# Altium PCB PCB1.PcbDoc
Units mm, origin at the board's own origin, x right, y up, seen from the top; angles counter-clockwise.
Board outline 149.99 x 100.08 mm, 2 copper layers (Top Layer, Bottom Layer); 80 components, 53 nets, 255 pads, 88 vias.
Unrouted connection lines stored in the file: 1.
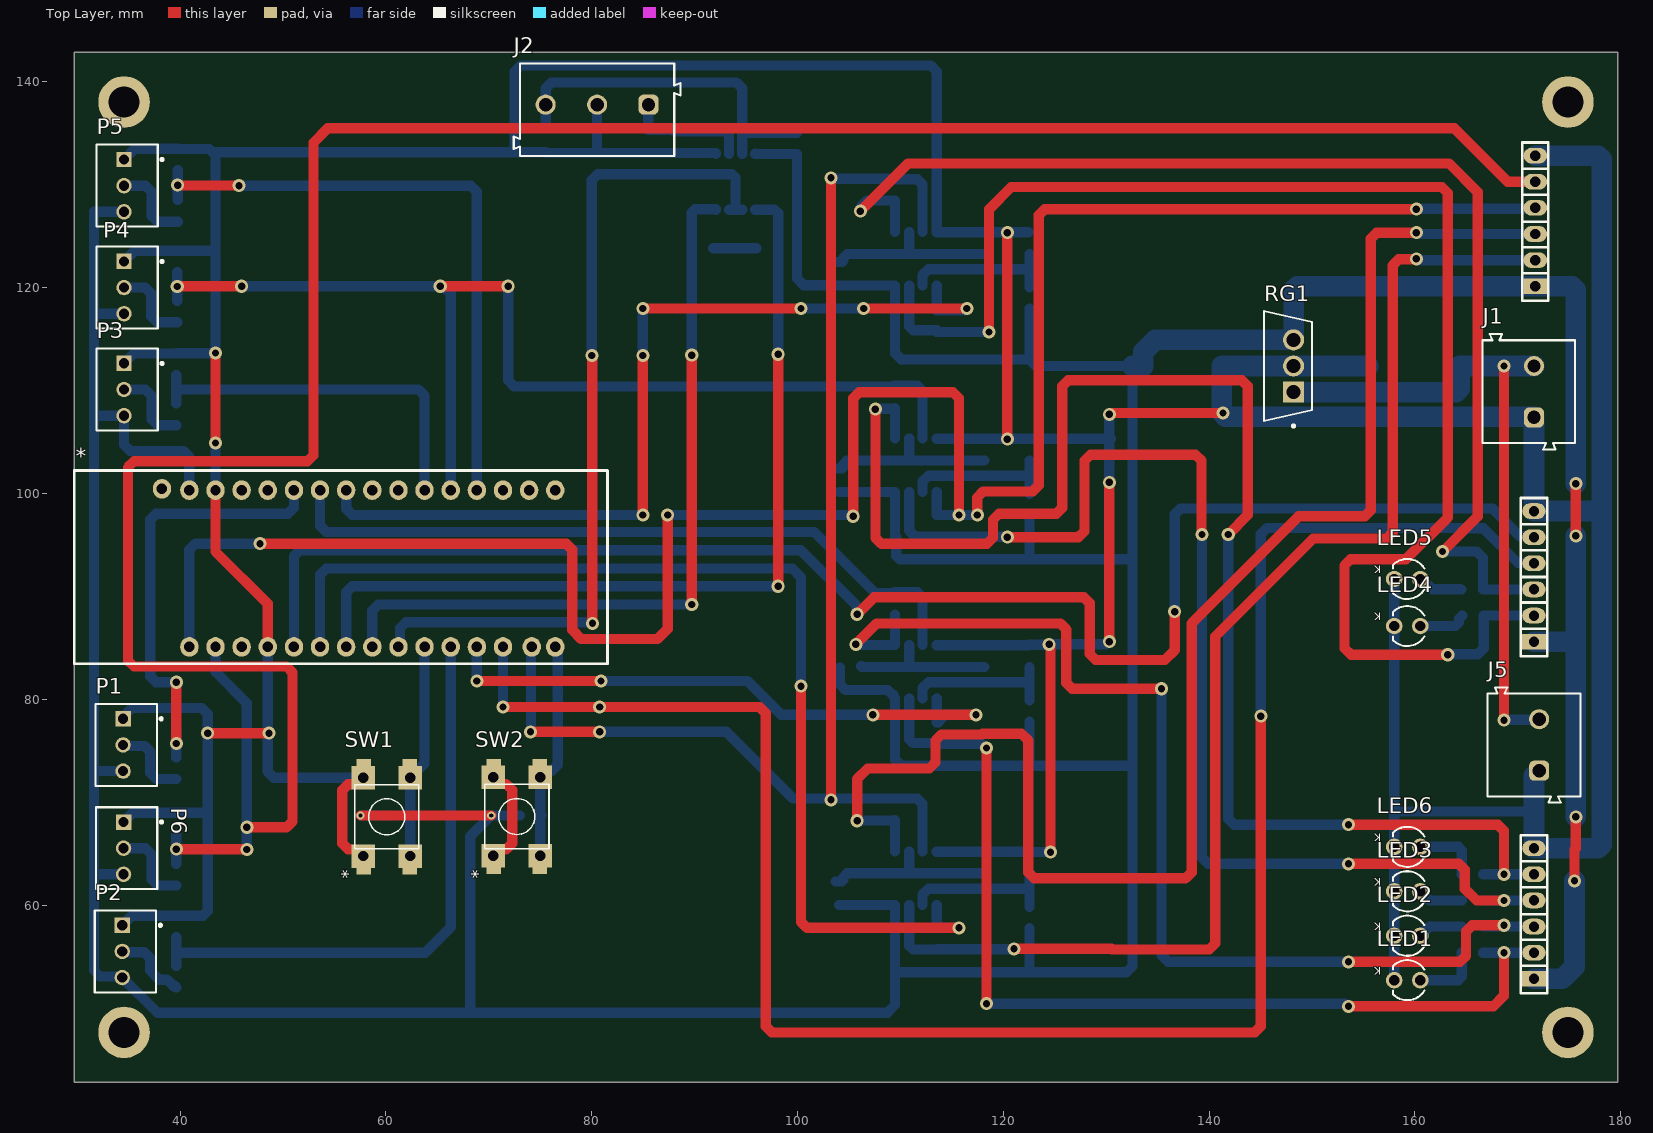
[diagram p0: Top Layer view]
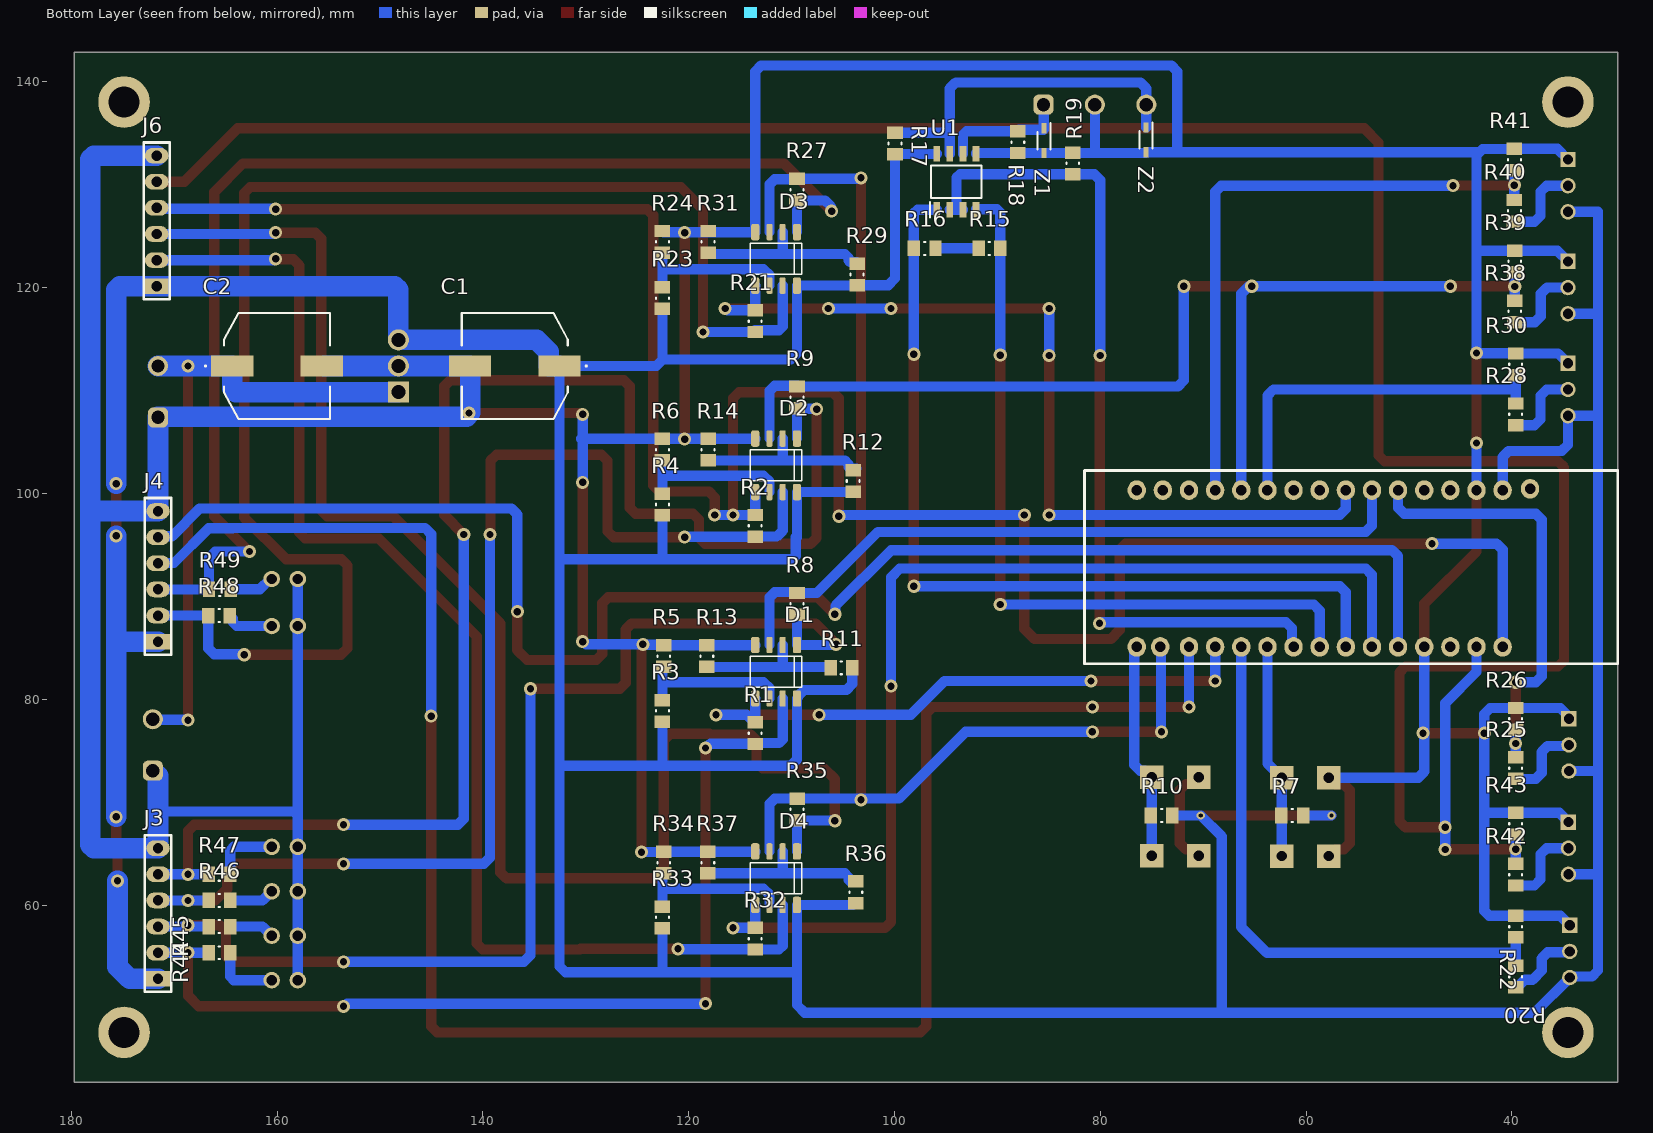
[diagram p1: Bottom Layer view, seen from below]
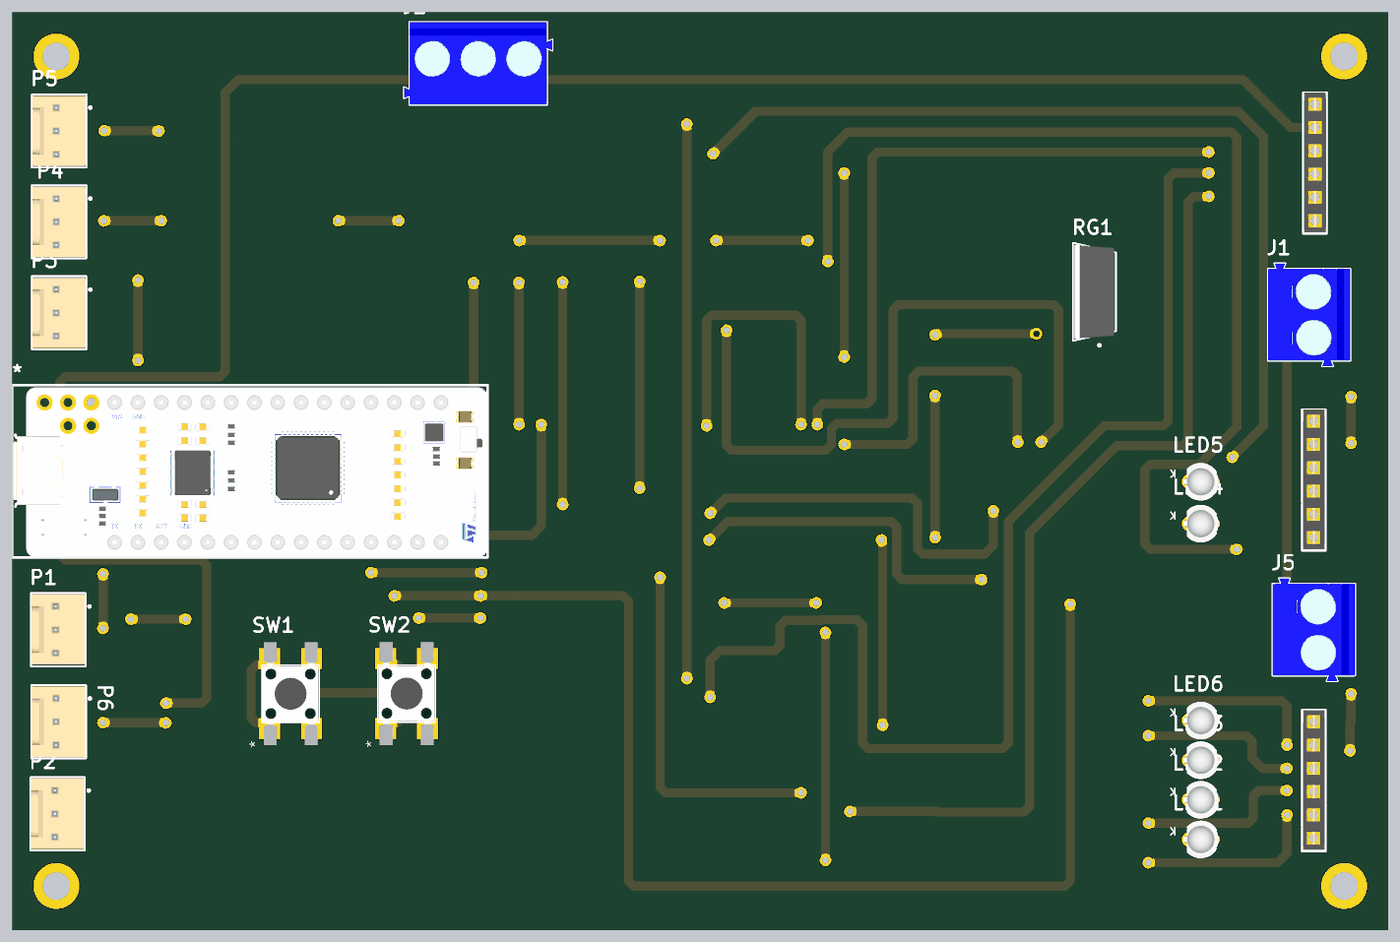
[diagram p2: 3D render of the assembled board from above, using the file's embedded part models]
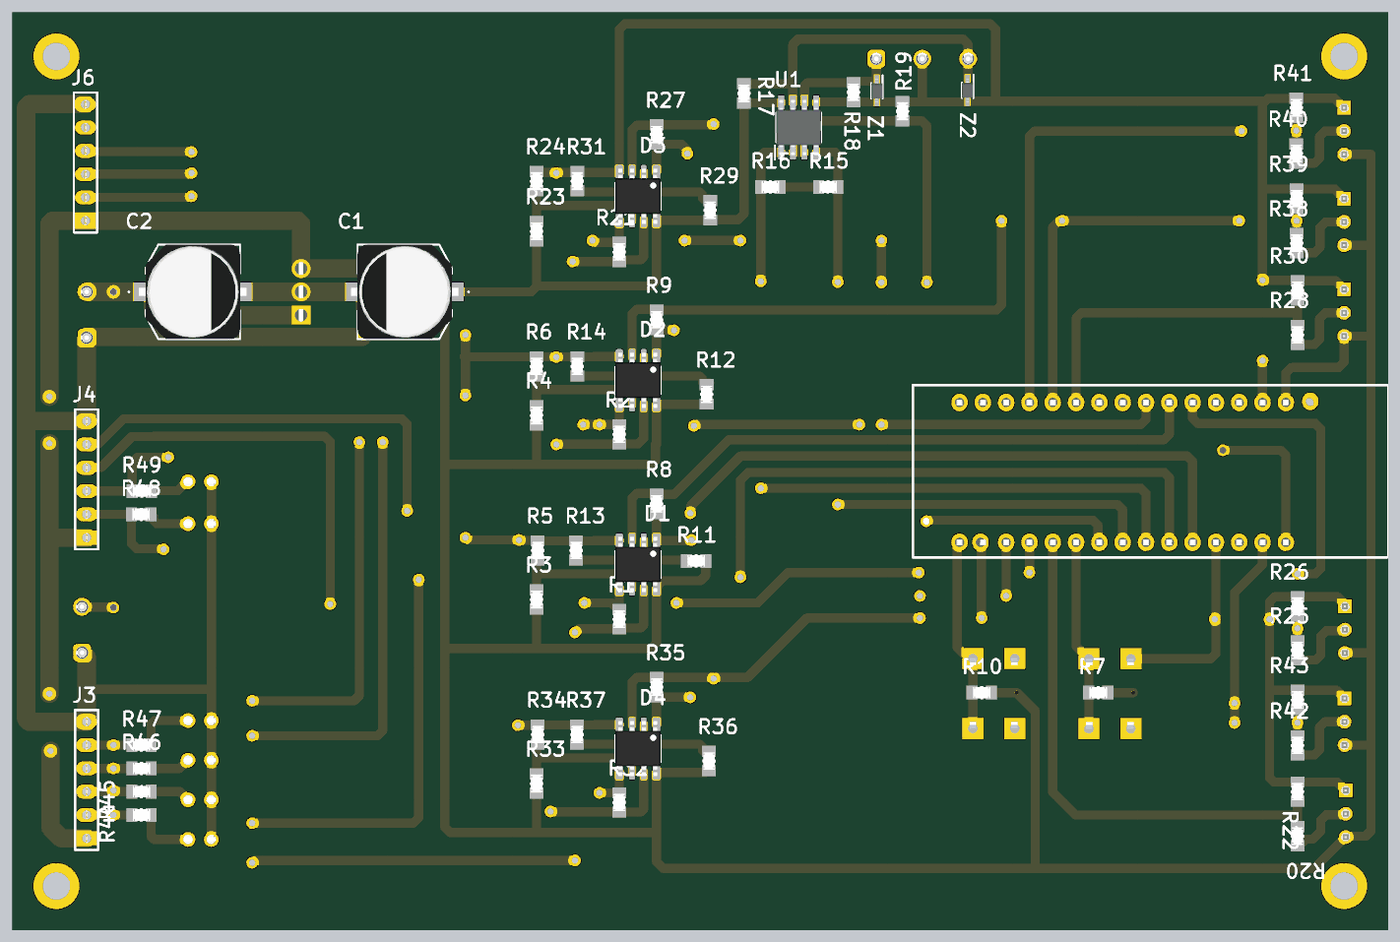
[diagram p3: 3D render of the assembled board from below, using the file's embedded part models]

## Layer stack, top to bottom
Top Solder: solder mask 0.0102, Solder Resist, Dk 3.5
Top Layer: signal copper 0.0356
Dielectric 1: dielectric 0.32, FR-4, Dk 4.8
Bottom Layer: signal copper 0.0356
Bottom Solder: solder mask 0.0102, Solder Resist, Dk 3.5

## Board outline
29.718,42.799 29.718,142.875 179.705,142.875 179.705,42.799

## Design rules (kind name [scope] priority, off if disabled: settings)
Clearance [All] p1: gap=0.254 ignorepadtopadclearanceinfootprint=FALSE except(0: Arc-Hole Track-Hole SMDPad-Hole THPad-Hole Via-Hole Fill-Hole Poly-Hole Region-Hole Text-Hole)
PolygonConnect [All] p1: connectstyle=Relief reliefconductorwidth=0.254 reliefentries=4 polygonreliefangle="90 Angle" airgapwidth=0.254
RoomDefinition Sheet1 [InComponentClass('Sheet1')] p1: confinementstyle=ConfineIn formatcopy=TRUE lockcomponents=FALSE outline 26.289,35.56 504.19,35.56 504.19,165.862 26.289,165.862
RoutingVias [All] p1: holewidth=0.711 width=1.27 viastyle="Through Hole" minholewidth=0.711 minwidth=1.27 maxholewidth=0.711 maxwidth=1.27
SolderMaskExpansion [All] p1: expansion=0.102 istentingtop=FALSE
Width [All] p1: maxlimit=2 minlimit=0.254 preferedwidth=1 minimp=50.000000 maximp=50.000000 favimp=50.000000
30 further rules are at their usual default settings.

## Components (designator, comment, footprint, x,y, rotation, side; value= is the part's Value field where it differs from the comment)
* "STM32F303K8T6" STMicroelectronics_0_MFG 59.563,92.329 r90 top locked
C1 "EEE1HA101AP" EEEFK1V331P 136.906,112.395 r90 bottom
C2 "EEE1HA101AP" EEEFK1V331P 160.02,112.395 r270 bottom
D1 "LMV358AIDR" 8-SOIC 111.506,82.677 r270 bottom
D2 "LMV358AIDR" 8-SOIC 111.506,102.743 r270 bottom
D3 "LMV358AIDR" 8-SOIC 111.506,122.809 r270 bottom
D4 "LMV358AIDR" 8-SOIC 111.506,62.611 r270 bottom
J1 "691101710002" 691101710002 171.077,109.895 r90 top
J2 "691101710003" 691101710003 80.518,137.295 r180 top
J3 "2.54_Connector _x6" "2.54_Connector _x6" 171.704,52.578 r90 bottom
J4 "2.54_Connector _x6" "2.54_Connector _x6" 171.704,85.344 r90 bottom
J5 "691101710002" 691101710002 171.577,75.565 r90 top
J6 "2.54_Connector _x6" "2.54_Connector _x6" 171.831,119.888 r90 bottom
LED1 "151033BS03000" "Type 3mm" 159.258,52.705 r180 top
LED2 "151033BS03000" "Type 3mm" 159.258,57.023 r180 top
LED3 "151033BS03000" "Type 3mm" 159.258,61.341 r180 top
LED4 "151033BS03000" "Type 3mm" 159.258,87.122 r180 top
LED5 "151033BS03000" "Type 3mm" 159.258,91.694 r180 top
LED6 "151033BS03000" "Type 3mm" 159.258,65.659 r180 top
P1 "61900311121" 61900311121 34.752,75.565 r90 top
P2 "61900311121" 61900311121 34.671,55.499 r90 top
P3 "61900311121" 61900311121 34.844,110.109 r90 top
P4 "61900311121" 61900311121 34.844,120.015 r90 top
P5 "61900311121" 61900311121 34.844,129.921 r90 top
P6 "61900311121" 61900311121 34.798,65.532 r90 top
R1 "1M" Vishay_CRCW0805-e3_IPC_A 113.538,76.708 r90 bottom
R2 "1M" Vishay_CRCW0805-e3_IPC_A 113.538,96.866 r90 bottom
R3 "10K" Vishay_CRCW0805-e3_IPC_A 122.555,78.867 r270 bottom
R4 "10K" Vishay_CRCW0805-e3_IPC_A 122.555,98.933 r270 bottom
R5 "2.2K" Vishay_CRCW0805-e3_IPC_A 122.428,84.201 r270 bottom
R6 "2.2K" Vishay_CRCW0805-e3_IPC_A 122.555,104.267 r270 bottom
R7 "10K" Vishay_CRCW0805-e3_IPC_A 61.341,68.707 r180 bottom
R8 "1M" Vishay_CRCW0805-e3_IPC_A 109.474,89.281 r90 bottom
R9 "1M" Vishay_CRCW0805-e3_IPC_A 109.474,109.347 r90 bottom
R10 "10K" Vishay_CRCW0805-e3_IPC_A 74.041,68.707 r180 bottom
R11 "10K" Vishay_CRCW0805-e3_IPC_A 105.156,83.058 r180 bottom
R12 "10K" Vishay_CRCW0805-e3_IPC_A 104.013,101.219 r270 bottom
R13 "2.2K" Vishay_CRCW0805-e3_IPC_A 118.237,84.201 r270 bottom
R14 "2.2K" Vishay_CRCW0805-e3_IPC_A 118.11,104.267 r270 bottom
R15 "10K" Vishay_CRCW0805-e3_IPC_A 90.77,123.825 r0 bottom
R16 "10K" Vishay_CRCW0805-e3_IPC_A 97.063,123.825 r180 bottom
R17 "10K" Vishay_CRCW0805-e3_IPC_A 99.949,134.02 r270 bottom
R18 "10K" Vishay_CRCW0805-e3_IPC_A 88.011,134.147 r90 bottom
R19 "10K" Vishay_CRCW0805-e3_IPC_A 82.677,132.08 r270 bottom
R20 "33K" Vishay_CRCW0805-e3_IPC_A 39.624,53.051 r270 bottom
R21 "1M" Vishay_CRCW0805-e3_IPC_A 113.538,116.748 r90 bottom
R22 "10K" Vishay_CRCW0805-e3_IPC_A 39.624,57.912 r90 bottom
R23 "10K" Vishay_CRCW0805-e3_IPC_A 122.555,118.999 r270 bottom
R24 "2.2K" Vishay_CRCW0805-e3_IPC_A 122.555,124.46 r270 bottom
R25 "33K" Vishay_CRCW0805-e3_IPC_A 39.624,73.314 r270 bottom
R26 "10K" Vishay_CRCW0805-e3_IPC_A 39.624,78.105 r90 bottom
R27 "1M" Vishay_CRCW0805-e3_IPC_A 109.474,129.54 r90 bottom
R28 "33K" Vishay_CRCW0805-e3_IPC_A 39.624,107.696 r270 bottom
R29 "10K" Vishay_CRCW0805-e3_IPC_A 103.632,121.285 r270 bottom
R30 "10K" Vishay_CRCW0805-e3_IPC_A 39.624,112.557 r90 bottom
R31 "2.2K" Vishay_CRCW0805-e3_IPC_A 118.11,124.46 r270 bottom
R32 "1M" Vishay_CRCW0805-e3_IPC_A 113.538,56.734 r90 bottom
R33 "10K" Vishay_CRCW0805-e3_IPC_A 122.555,58.801 r270 bottom
R34 "2.2K" Vishay_CRCW0805-e3_IPC_A 122.428,64.135 r270 bottom
R35 "1M" Vishay_CRCW0805-e3_IPC_A 109.46,69.304 r90 bottom
R36 "10K" Vishay_CRCW0805-e3_IPC_A 103.759,61.249 r270 bottom
R37 "2.2K" Vishay_CRCW0805-e3_IPC_A 118.143,64.135 r270 bottom
R38 "33K" Vishay_CRCW0805-e3_IPC_A 39.716,117.694 r270 bottom
R39 "10K" Vishay_CRCW0805-e3_IPC_A 39.716,122.555 r90 bottom
R40 "33K" Vishay_CRCW0805-e3_IPC_A 39.751,127.473 r270 bottom
R41 "10K" Vishay_CRCW0805-e3_IPC_A 39.751,132.461 r90 bottom
R42 "33K" Vishay_CRCW0805-e3_IPC_A 39.624,62.957 r270 bottom
R43 "10K" Vishay_CRCW0805-e3_IPC_A 39.624,67.91 r90 bottom
R44 "220" Vishay_CRCW0805-e3_IPC_A 165.608,55.372 r0 bottom
R45 "220" Vishay_CRCW0805-e3_IPC_A 165.608,57.912 r0 bottom
R46 "220" Vishay_CRCW0805-e3_IPC_A 165.608,60.452 r0 bottom
R47 "220" Vishay_CRCW0805-e3_IPC_A 165.608,62.992 r0 bottom
R48 "220" Vishay_CRCW0805-e3_IPC_A 165.643,88.138 r0 bottom
R49 "220" Vishay_CRCW0805-e3_IPC_A 165.573,90.678 r0 bottom
RG1 "Reg_Fairchild_LM7805CT_eec" ON_Semiconductor_TO220B03_MFG 147.669,112.395 r180 top
SW1 "4-1437565-2" SW4_FSM-5P23_TEC 60.071,68.58 r90 top
SW2 "4-1437565-2" SW4_FSM-5P23_TEC 72.72,68.605 r90 top
U1 "MAX485ECSA+" SOIC127P600X175-8N 93.98,130.302 r90 bottom
Z1 "MM3Z5V1ST1G" SOD2512X110N 85.471,134.296 r270 bottom
Z2 "MM3Z5V1ST1G" SOD2512X110N 75.565,134.366 r270 bottom

## Footprints (in the part's own frame and the unit in brackets; to place one, negate y for a bottom-side part, rotate by r counter-clockwise, add the part's x,y. Pads: shape width x height; smd on the part's side, far side on the other; paste and mask are expansions set on the pad)
"2.54_Connector _x6" [mil]
  rect 60x90 hole 40: 1(10,-5)
  oval 60x90 hole 40: 2(110,-5) 3(210,-5) 4(310,-5) 5(410,-5) 6(510,-5)
  silkscreen extent -40,-55 560,45, body extent -40,-52 560,42, height 108
8-SOIC [mm] "SOIC, 8-Leads, Body 4,90x3,90mm, Pitch 1,27mm, IPC Medium Density"
  rrect50% 1.6x0.8 smd: 1(-2.6,2.025) 4(-2.6,-2.025) 5(2.6,-2.025) 8(2.6,2.025)
  rrect50% 1.6x0.6 smd: 2(-2.6,0.635) 3(-2.6,-0.635) 6(2.6,-0.635) 7(2.6,0.635)
  silkscreen extent -1.5,-2.5 1.5,2.5, body extent -3,-2.45 3,2.45, height 1.75
61900311121 [mm] "2.54mm Male Locking Header, 3p"
  rect 1.5x1.5 hole 1: 1(2.54,0.3)
  round 1.5 hole 1: 2(0,0.3) 3(-2.54,0.3)
  silkscreen extent -3.98,-3.52 3.98,2.98, body extent -3.81,-2.9 3.81,2.9, height 11.53
691101710002 [mm] "5,00mm - modular - blue - Horizontal entry with pressure clamp - 12,6mm height - 02p"
  rrect50% 1.95x1.95 hole 1.3: 1(-2.5,-0.5)
  round 1.95 hole 1.3: 2(2.5,-0.5)
  silkscreen extent -5.6,-4.5 5.6,4.5, body extent -5.6,-4.5 5.6,4.5, height 12.65
691101710003 [mm] "5,00mm - modular - blue - Horizontal entry with pressure clamp - 12,6mm height - 03p"
  rrect50% 1.95x1.95 hole 1.3: 1(-5,-0.5)
  round 1.95 hole 1.3: 2(0,-0.5) 3(5,-0.5)
  silkscreen extent -8.1,-4.5 8.1,4.5, body extent -8.1,-4.5 8.1,4.5, height 12.65
EEEFK1V331P [mm]
  rect 2x4.1 smd: 1(0,-4.35) 2(0,4.35)
  silkscreen extent -5.15,-7 5.15,5.15, body extent -5.15,-5.85 5.15,5.85, height 10.3
ON_Semiconductor_TO220B03_MFG [mm]
  rect 2.05x2.05 hole 1.35 paste-1000 mask+0: 1(-0.54,2.535)
  round 2.05 hole 1.35 paste-1000 mask+0: 2(-0.54,0) 3(-0.54,-2.535)
  silkscreen extent -2.35,-5.34 2.35,5.96, body extent -2.45,-5.44 2.45,5.44, height 0.25
SOD2512X110N [mm]
  rect 1x0.5 smd: 1(-1.2,0) 2(1.2,0)
  silkscreen extent -1.7,-0.63 0.85,0.63, body extent -1.25,-0.63 1.25,0.63, height 1.1
SOIC127P600X175-8N [mm]
  rect 1.525x0.65 smd: 1(-2.712,1.905) 2(-2.712,0.635) 3(-2.712,-0.635) 4(-2.712,-1.905) 5(2.712,-1.905) 6(2.712,-0.635) 7(2.712,0.635) 8(2.712,1.905)
  silkscreen extent -3.47,-2.45 1.6,2.58, body extent -3,-2.45 3,2.45, height 1.75
STMicroelectronics_0_MFG [mil]
  oval 75x70 hole 40: 0(-285,735) 1(-285,635) 2(-285,535) 3(-285,435) 4(-285,335) 5(-285,235) 6(-285,135) 7(-285,35) 8(-285,-65) 9(-285,-165) 10(-285,-265) 11(-285,-365) 12(-285,-465) 13(-285,-575) 14(-285,-665) 15(315,735) 16(315,635) 17(315,535) 18(315,435) 19(315,335) 20(315,235) 21(315,135) 22(315,35) 23(315,-65) 24(315,-165) 25(315,-265) 26(315,-365) 27(315,-465) 28(315,-565) 29(315,-665) 30(320,840)
  silkscreen extent -350,-865 390,1175, body extent -350,-865 380,1169, height 289
SW4_FSM-5P23_TEC [mil]
  rect 83x55 smd paste+0 mask+0: 1(-179,88) 2(179,88) 3(-179,-88) 4(179,-88)
  rect 90x90 hole 40: 1(-150,90) 2(150,90) 3(-150,-90) 4(150,-90)
  silkscreen extent -123,-123 123,123, body extent -152,-118 152,118, height 669
"Type 3mm" [mm] "THT, LED-3mm, 2pin- Body 4.15mm(max)"
  round 1.6 hole 1: 1(1.27,0) 2(-1.27,0)
  silkscreen extent -1.66,-1.95 1.4,1.95, body extent -1.93,-1.94 1.87,1.94, height 10.5
Vishay_CRCW0805-e3_IPC_A [mil]
  rect 47.5x59.38 smd paste+0 mask+0: 1(-41.37,0) 2(41.37,0)
  silkscreen extent -3,-25 3,25, body extent -39,-25 39,25, height 20

## Part data
C1 C2: "Capacitor Polarised", Manufacturer_Name=Panasonic, Datasheet Link=http://industrial.panasonic.com/cdbs/www-data/pdf/RDE0000/ABA0000C1142.pdf, Manufacturer_Part_Number=EEE1HA101AP
D1 D2 D3 D4: "Микросхема сдвоенный ОУ", Package=8-SOIC, ComponentDescription="Микросхема сдвоенный ОУ, LMV358AIDR, 8-SOIC", ComponentTypе="Микросхема сдвоенный ОУ"
J1 J5: "WR-TBL Series 101 Horizontal Entry Modular, THT, pitch 5mm, 2p", Manufacturer="Wurth Elektronik", Operating Temperature Max=105°C, Operating Temperature Min=-40°C, Rated Current=16A, Working Voltage=250V, Application="Pressure Clamp", Category="Terminal Blocks", ComponentLink1Description="Website Link", ComponentLink1URL=https://www.we-online.com/redexpert/article/691101710002?ad, ComponentLink2Description="Datasheet Link", ComponentLink2URL=https://www.we-online.com/redexpert/spec/691101710002?ad, Manufacturer Part Number=691101710002, Match Code=WR-TBL, Modularity=Yes, Mount="Through Hole", Number of Pins=2, Number of Rows=1, Orientation=Horizontal, Packaging=Box, Pitch=5mm
J2: "WR-TBL Series 101 Horizontal Entry Modular, Through Hole, pitch 5mm, 3p", Manufacturer="Wurth Elektronik", Operating Temperature Max=105°C, Operating Temperature Min=-40°C, Rated Current=16A, Working Voltage=250V, Application="Pressure Clamp", Category="Terminal Blocks", ComponentLink1Description="Manufacturer Link", ComponentLink1URL=https://www.we-online.com/redexpert/article/691101710003?ad, ComponentLink2Description=Datasheet, ComponentLink2URL=https://www.we-online.com/redexpert/spec/691101710003?ad, Manufacturer Part Number=691101710003, Match Code=WR-TBL, Modularity=Yes, Mount="Through Hole", Orientation=Horizontal, Packaging=Box, PCB/Cable/Panel=PCB, Pin Number=3, Pitch=5mm
LED1 LED2 LED3 LED4 LED5 LED6: "THT LED round mono-color waterclear, WL-TMRW , Blue", Emitting color=Blue, Manufacturer="Wuerth Elektronik", ComponentLink1Description="Manufacturer URL", ComponentLink1URL=http://www.we-online.com, ComponentLink2Description=Datasheet, ComponentLink2URL=http://katalog.we-online.de/pbs/datasheet/7448042001.pdfhttp://katalog.we-online.de/pbs/datasheet/7448042001.pdfhttp://katalog.we-online.de/pbs/datasheet/7448042001.pdfhttp://katalog.we-online.de/pbs/datasheet/151033BS03000.pdf, PackageReference="Type 3mm", PartNumber=151033BS03000
P1 P2 P3 P4 P5 P6: "WR-WTB THT Male Vertical Locking Header, pitch 2.54mm, 3p", Contact Resistance=20mOhm, Operating Temperature="-40 to +105degC", Rated Current=3A, Withstanding Voltage=1000VAC, Working Voltage=250VAC, ComponentLink1Description=Manufacturer, ComponentLink1URL=http://www.we-online.de, ComponentLink2Description=Datasheet, ComponentLink2URL=https://www.we-online.com/catalog/datasheet/61900311121.pdf, Gender=Male, Mounting Technology=THT, Packaging=Bag, Part Number=61900311121, Pin Number=3, Pitch=2.54mm, Published Date="January 2020", Publisher="Wurth Elektronik", Type=Vertical
R1 R2 R3 R4 R5 R6 R7 R8 R9 R10 R11 R12 R13 R14 R15 R16 R17 R18 R19 R20 R21 R22 R23 R24 R25 R26 R27 R28 R29 R30 R31 R32 R33 R34 R35 R36 R37 R38 R39 R40 R41 R42 R43 R44 R45 R46 R47 R48 R49: library part RC0805FR-07100KL
RG1: "REG IC REG LINEAR 5V 1A TO220AB", Current-Output=1A, Digikey Part Number=LM7805CT-ND, Manufacturer=Fairchild, Mouser Part Number=512-LM7805CT, Package=TO220, Part Number=LM7805CT, Temperature="-40°C to +125°C", Temperature Range High=+125°C, Temperature Range Low=-40°C, Voltage - Input (Max)=35V, Voltage - Output=5V, Voltage Dropout (Max)="2V @ 1A (Typ)", ComponentLink1Description=Upverter, ComponentLink1URL=https://upverter.com/upn/revision/b27a7358b7dd93a3/, ComponentLink2Description=Datasheet, ComponentLink2URL=https://www.fairchildsemi.com/datasheets/LM/LM7805.pdf, Digikey Description="REG IC REG LINEAR 5V 1A TO220AB", helpURL=https://upverter.com/upn/revision/b27a7358b7dd93a3/, Ipc Land Pattern Name=TO-220, Lead Free=yes, Price=0.384521982769, RoHS=TRUE, Supplier 1=Digi-Key, Supplier 2=Mouser, Supplier Part Number 1=LM7805CT-ND, Supplier Part Number 2=512-LM7805CT
SW1 SW2: "No Description Available", Mfr_Name="TE Connectivity", Copyright="Copyright (C) 2022 Ultra Librarian. All rights reserved.", Manufacturer_Part_Number=4-1437565-2, RefDes=RefDes, Type=DEV
Z1 Z2: "Zener Diode", Manufacturer_Name=onsemi, Mouser Part Number=863-MM3Z5V1ST1G, Arrow Part Number=MM3Z5V1ST1G, Arrow Price/Stock=https://www.arrow.com/en/products/mm3z5v1st1g/on-semiconductor?region=nac, Datasheet Link=http://www.onsemi.com/pub/Collateral/MM3Z2V4ST1-D.PDF, Height=1.1mm, Manufacturer_Part_Number=MM3Z5V1ST1G, Mouser Price/Stock=https://www.mouser.co.uk/ProductDetail/onsemi/MM3Z5V1ST1G?qs=HVbQlW5zcXXFXX%2FQxsNWFg%3D%3D

## Free pads (board coordinates)
  round 5 hole 3: 2(34.544,47.625) 2(34.544,138.049) 2(174.879,47.625) 2(174.879,138.049)

## Via types
v1: diameter 1.27, hole 0.711, Top Layer to Bottom Layer, 86 vias
v2: diameter 0.8, hole 0.4, Top Layer to Bottom Layer, tented both sides, 2 vias

## Nets (pads, with @x,y where several pads share a name; then routed paths per layer and width w, separated by ;. In a path a pad name is that pad's centre, name@x,y a point inside that pad or via, vN(x,y) a via of type N, cw(c..) or ccw(c..) an arc to the next point about the centre after c; other vN are vias at no path point)
+3v3: R15.2 R16.2 | length 4.2
  Bottom Layer w1: R15.2 R16.2
GND: *.3 *.16 C1.2 C2.2 D1.4 D2.4 D3.4 D4.4 J1.1 J2.2 J3.6 J4.6 J5.1 J6.6 LED1.1 LED2.1 LED3.1 LED4.1 LED5.1 LED6.1 P1.1 P2.1 P3.1 P4.1 P5.1 P6.1 R5.1 R6.1 R13.1 R14.1 R18.1 R19.1 R22.2 R24.1 R26.2 R30.2 R31.1 R34.1 R37.1 R39.2 R41.2 R43.2 RG1.2 SW1.1 SW1.2 SW2.1 SW2.2 U1.5 Z1.2 Z2.2 | length 624
  Top Layer w1: v1(42.672,76.708) v1(48.641,76.708) ; *.16 43.434,94.361 48.514,89.281 *.3 ; v1(43.434,104.902) v1(43.434,113.665) ; SW1.1@57.785,64.77 57.142,65.413 56.339,65.413 55.753,65.999 55.753,71.161 56.339,71.747 57.142,71.747 57.531,72.136 57.531,72.644 SW1.2@57.785,72.39 ; SW2.1@70.434,64.795 71.077,65.438 71.677,65.438 72.263,66.024 72.263,71.187 71.677,71.772 71.077,71.772 70.663,72.187 70.663,72.644 SW2.2@70.434,72.415 ; v1(120.396,105.283) v1(120.396,125.349) ; v1(124.46,85.344) 124.46,85.271 124.587,85.144 v1(124.587,65.151) ; v1(130.302,85.598) v1(130.302,101.092) ; v1(130.302,107.696) 130.375,107.696 130.502,107.823 v1(141.351,107.823)
  Bottom Layer w1: P2.1 35.295,58.963 R22.2 42.199,58.963 42.672,59.436 42.672,69.215 ; P1.1 34.702,78.355 34.702,78.57 35.288,79.156 R26.2 42.086,79.156 42.672,78.57 v1(42.672,76.708) 42.672,69.215 ; P6.1 35.387,68.961 R43.2 42.418,68.961 42.672,69.215 ; P3.1 35.503,113.608 R30.2 39.653,113.636 43.405,113.636 v1(43.434,113.665) 43.434,123.606 ; P4.1 35.595,123.606 R39.2 43.434,123.606 ; P5.1 35.595,133.512 R41.2 39.786,133.477 42.848,133.477 43.159,133.166 ; *.16 v1(43.434,104.902) ; *.3 48.514,72.976 49.1,72.39 SW1.2@57.785,72.39 ; J2.2 80.518,133.121 80.543,133.096 ; U1.5 92.075,133.071 92.05,133.096 R18.1 Z1.2 80.543,133.096 ; D4.4 113.544,65.198 116.319,65.198 116.332,65.186 R34.1 122.445,65.168 124.57,65.168 v1(124.587,65.151) ; D1.4 113.544,85.264 116.319,85.264 116.332,85.252 R13.1 R5.1 122.474,85.298 124.414,85.298 v1(124.46,85.344) 129.975,85.344 130.229,85.598 v1(130.302,85.598) ; D2.4 113.544,105.33 116.319,105.33 116.332,105.318 R14.1 R6.1 130.429,105.318 ; R24.1@122.428,125.384 116.332,125.384 116.319,125.396 113.544,125.396 D3.4 113.531,141.019 112.945,141.605 73.103,141.605 72.517,141.019 72.517,133.166 ; v1(130.302,101.092) v1(130.302,107.696) ; v1@141.224,107.833 v1@141.575,107.482 ; C1.2@141.224,112.363 C1.2 ; LED1.1 LED2.1 LED3.1 LED6.1 157.988,68.737 ; LED5.1 LED4.1 157.988,68.737 ; 171.537,69.088 158.339,69.088 157.988,68.737 ; J5.1@171.577,72.565 J5.1 ; 43.159,133.166 43.434,132.891 43.434,123.606 ; 43.159,133.166 72.517,133.166 ; 72.517,133.166 Z2.2 75.565,133.146 75.615,133.096 80.543,133.096
  Bottom Layer w2: v1@141.224,107.833 C1.2@141.224,112.363 ; C1.2 RG1.2 C2.2@155.448,112.395 ; v1@141.575,107.482 J1.1@171.569,107.482 ; 171.537,69.088 171.577,69.048 ; J5.1@171.577,72.565 171.577,69.048 ; J1.1@171.577,107.474 J4.6 178.054,98.298 178.181,98.171 ; J6.6 177.83,132.842 178.181,132.491 178.181,98.171 ; 171.577,69.048 J3.6 177.83,65.532 178.181,65.883 178.181,98.171
Net*_0: *.0 D2.5 J6.4 R2.2 | length 216.8
  Top Layer w1: v1(47.752,95.123) 77.519,95.123 78.105,94.537 78.105,86.741 78.994,85.852 86.36,85.852 87.376,86.868 v1(87.376,97.917) ; v1(105.41,97.79) 105.41,109.269 105.996,109.855 115.111,109.855 115.697,109.269 v1(115.697,97.917) ; v1@117.475,97.99 117.475,99.617 118.061,100.203 122.858,100.203 123.444,100.789 123.444,127.049 124.03,127.635 v1(160.147,127.635)
  Bottom Layer w1: *.0 40.894,94.537 41.48,95.123 v1(47.752,95.123) ; v1(87.376,97.917) 105.21,97.917 105.337,97.79 v1(105.41,97.79) ; D2.5 113.534,100.139 113.534,97.921 R2.2 v1(115.697,97.917) v1(117.475,97.917) ; v1(160.147,127.635) 160.199,127.687 171.629,127.687 J6.4
Net*_1: *.1 J6.5 R42.1 R43.1 | length 255.5
  Top Layer w1: v1(39.624,65.434) 39.638,65.419 46.468,65.419 v1(46.482,65.405) ; v1(46.482,67.564) 50.341,67.564 50.927,68.15 50.927,82.599 50.341,83.185 35.511,83.185 34.925,83.771 34.925,102.538 35.511,103.124 52.373,103.124 52.959,103.71 52.959,134.112 54.356,135.509 163.83,135.509 169.037,130.302 J6.5
  Bottom Layer w1: R42.1 v1(39.624,65.434) R43.1 ; *.1 43.434,82.677 46.482,79.629 v1(46.482,67.564) v1(46.482,65.405)
Net*_4: *.4 J4.5 | length 153.7
  Top Layer w1: v1(105.791,88.265) 107.442,89.916 127.811,89.916 128.397,89.33 128.397,84.406 128.983,83.82 135.685,83.82 136.652,84.787 v1(136.652,88.519)
  Bottom Layer w1: *.4 51.054,93.902 51.64,94.488 100.33,94.488 105.739,89.079 105.739,88.317 v1(105.791,88.265) ; v1(136.652,88.519) 136.652,97.966 137.238,98.552 167.513,98.552 170.207,95.858 171.477,95.858 J4.5
Net*_5: *.5 D4.5 R32.2 | length 107.9
  Top Layer w1: v1(100.33,81.28) 100.33,58.371 100.916,57.785 v1(115.697,57.785)
  Bottom Layer w1: *.5 53.594,92.124 54.18,92.71 99.49,92.71 100.33,91.87 v1(100.33,81.28) ; D4.5 113.534,60.008 113.534,57.789 R32.2 v1(115.697,57.785)
Net*_6: *.6 R16.1 U1.1 | length 86.2
  Top Layer w1: v1(98.114,113.538) v1(98.114,90.989) v1@98.171,90.932
  Bottom Layer w1: *.6 56.134,90.403 56.72,90.989 v1(98.114,90.989) ; U1.1 97.762,127.59 98.114,127.239 R16.1 v1(98.114,113.538)
Net*_7: *.7 R15.1 U1.4 | length 75.5
  Top Layer w1: v1@89.662,89.154 v1(89.719,89.211) v1(89.719,113.454)
  Bottom Layer w1: *.7 58.674,88.625 59.26,89.211 v1(89.719,89.211) ; v1(89.719,113.454) R15.1 89.719,127.284 90.071,127.635 92.05,127.635 92.075,127.61 U1.4
Net*_8: *.8 R19.2 U1.2 U1.3 | length 82.6
  Top Layer w1: v1(80.01,113.411) 80.04,113.381 80.04,87.418 v1(80.07,87.388)
  Bottom Layer w1: *.8 61.363,85.239 61.363,86.917 61.949,87.503 v1@80.01,87.503 ; v1(80.01,113.411) 80.01,130.443 80.596,131.029 93.629,131.029 93.98,130.678 93.98,127.59 ; U1.3 93.98,127.59 ; U1.2 93.98,127.59
Net*_9: *.9 R7.1 SW1.3 SW1.4 | length 20.9
  Bottom Layer w1: SW1.3@62.357,64.77 62.357,68.707 62.357,72.39 63.754,73.787 *.9
Net*_10: *.10 R20.1 R22.1 | length 57.7
  Bottom Layer w1: R20.1 39.624,55.372 ; R22.1 39.624,55.372 ; *.10 66.294,57.863 63.803,55.372 39.624,55.372
Net*_11: *.11 D1.5 R1.2 | length 59.5
  Top Layer w1: v1(68.834,81.788) v1(80.899,81.788) ; v1(107.315,78.486) v1(117.348,78.486)
  Bottom Layer w1: v1(68.834,81.788) *.11 ; v1(80.899,81.788) 95.123,81.788 98.425,78.486 v1(107.315,78.486) ; D1.5 113.534,80.073 113.534,77.855 R1.2@113.538,77.851 ; R1.2 113.689,77.759 113.792,77.862 113.792,77.9 114.378,78.486 v1(117.348,78.486)
Net*_12: *.12 J4.4 | length 186.7
  Top Layer w1: v1(71.374,79.248) 96.315,79.248 96.901,78.662 96.901,48.211 97.487,47.625 144.448,47.625 145.034,48.211 v1(145.034,78.359)
  Bottom Layer w1: v1(71.374,79.248) *.12 ; v1(145.034,78.359) 145.034,96.061 145.62,96.647 164.338,96.647 164.368,96.617 166.654,96.617 170.025,93.246 171.549,93.246 J4.4
  other v1: 80.772,79.248
Net*_13: *.13 D3.3 D4.3 R27.2 R35.2 | length 128.2
  Top Layer w1: v1(74.041,76.835) v1(80.772,76.835) ; v1(103.251,70.231) v1(103.251,130.683)
  Bottom Layer w1: v1(74.041,76.835) 74.093,76.887 74.093,85.015 *.13 ; v1(80.772,76.835) 93.091,76.835 99.571,70.355 103.251,70.355 R35.2 111.636,70.355 112.141,69.85 D4.3 ; v1(103.251,130.683) 103.324,130.683 103.416,130.591 R27.2 ; R27.2@109.46,130.553 111.636,130.553 112.141,130.048 D3.3
Net*_14: *.14 R10.1 SW2.3 SW2.4 | length 21.5
  Bottom Layer w1: SW2.3@75.006,64.795 R10.1@75.006,68.621 ; R10.1 R10.1@75.006,68.621 ; *.14 76.454,84.816 76.708,84.562 76.708,73.644 76.122,73.058 75.649,73.058 75.006,72.415 R10.1@75.006,68.621
Net*_19: *.19 R25.1 R26.1 | length 42.8
  Top Layer w1: v1(39.624,75.709) v1(39.624,81.661)
  Bottom Layer w1: R25.1 v1(39.624,75.709) R26.1 ; v1(39.624,81.661) 37.67,81.661 37.084,82.247 37.084,97.458 37.67,98.044 50.468,98.044 51.054,98.63 *.19
Net*_20: *.20 D1.3 R8.2 | length 69.6
  Bottom Layer w1: *.20 53.594,96.852 54.18,96.266 101.6,96.266 107.534,90.332 R8.2 ; R8.2@109.46,90.421 111.636,90.421 112.141,89.916 D1.3
Net*_21: *.21 D3.5 R21.2 | length 87.7
  Top Layer w1: v1(84.963,97.917) v1(84.963,113.411) ; v1(84.963,117.983) v1(100.33,117.983) ; v1(106.426,117.983) v1(116.459,117.983)
  Bottom Layer w1: *.21 56.134,98.503 56.72,97.917 v1(84.963,97.917) ; v1(84.963,113.411) v1(84.963,117.983) ; v1(100.33,117.983) v1(106.426,117.983) ; D3.5 113.534,120.206 113.534,117.987 R21.2@113.538,117.983 ; R21.2 116.202,117.799 116.386,117.983 v1(116.459,117.983)
Net*_24: *.24 R28.1 R30.1 | length 36.1
  Bottom Layer w1: R28.1 R30.1 ; 39.878,110.109 63.168,110.109 63.754,109.523 *.24
Net*_25: *.25 D2.3 R9.2 R38.1 R39.1 | length 109.9
  Top Layer w1: v1(39.716,120.125) 39.725,120.133 45.965,120.133 v1(45.974,120.142) ; v1(65.278,120.142) v1(71.882,120.142)
  Bottom Layer w1: R38.1 v1(39.716,120.125) R39.1 ; v1(45.974,120.142) v1(65.278,120.142) 65.33,120.09 65.625,120.09 66.294,119.421 *.25 ; v1(71.882,120.142) 71.882,110.984 72.468,110.398 R9.2 ; R9.2@109.46,110.487 111.636,110.487 112.141,109.982 D2.3
Net*_26: *.26 R40.1 R41.1 | length 61.2
  Top Layer w1: v1(39.751,129.967) 39.774,129.944 45.697,129.944 v1(45.72,129.921)
  Bottom Layer w1: R40.1 v1(39.751,129.967) R41.1 ; v1(45.72,129.921) 68.248,129.921 68.834,129.335 *.26
NetC2_1: C2.1 J1.2 J5.2 RG1.1 | length 63.6
  Top Layer w1: v1(168.656,77.978) v1(168.656,112.395)
  Bottom Layer w1: v1(168.656,77.978) 168.699,78.021 172.034,78.021 J5.2
  Bottom Layer w2: RG1.1 164.019,109.86 164.37,110.211 C2.1 v1(168.656,112.395) J1.2
NetD1_1: D1.1 J3.3 R8.1 R45.2 | length 110.4
  Top Layer w1: v1(105.664,85.344) 107.696,87.376 125.525,87.376 126.111,86.79 126.111,81.612 126.697,81.026 v1(135.382,81.026) ; v1(153.543,54.483) 164.387,54.483 164.973,55.069 164.973,57.453 165.559,58.039 v1(168.656,58.039)
  Bottom Layer w1: v1(105.664,85.344) 105.737,85.344 105.804,85.277 D1.1 R8.1@109.481,88.23 ; v1(135.382,81.026) 135.382,55.118 136.017,54.483 v1(153.543,54.483) ; R45.2 168.456,57.912 168.583,58.039 v1(168.656,58.039) 168.729,58.039 168.856,57.912 J3.3
NetD1_2: D1.2 R11.1 R13.2 | length 14.1
  Bottom Layer w1: R11.1@106.186,83.199 106.235,83.15 110.871,83.15 ; D1.2 110.871,83.15 ; R13.2@118.143,83.15 110.871,83.15
NetD1_6: D1.6 R3.1 R5.2 | length 15
  Bottom Layer w1: D1.6 112.141,81.075 112.727,81.661 122.331,81.661 122.555,81.885 ; R3.1 122.555,81.885 ; R5.2@122.555,83.15 122.555,81.885
NetD1_7: D1.7 J3.2 R1.1 R44.2 | length 96.6
  Top Layer w1: v1(118.364,50.419) v1(118.364,75.272) ; v1(153.543,50.165) 167.64,50.165 168.656,51.181 v1(168.656,55.372)
  Bottom Layer w1: D1.7 110.871,76.101 111.222,75.749 R1.1@113.538,75.749 ; R1.1 113.775,75.657 113.792,75.675 117.888,75.675 118.291,75.272 v1(118.364,75.272) ; v1(118.364,50.419) 153.216,50.419 153.47,50.165 v1(153.543,50.165) ; R44.2 v1(168.656,55.372) J3.2
NetD2_1: D2.1 J3.5 R9.1 R47.2 | length 147.8
  Top Layer w1: v1(107.569,108.204) 107.569,95.709 108.155,95.123 118.413,95.123 118.999,95.709 118.999,97.458 119.585,98.044 125.144,98.044 125.73,98.63 125.73,110.412 126.316,110.998 143.178,110.998 143.764,110.412 143.764,97.917 v1(141.859,96.012) ; v1(153.543,67.818) 168.07,67.818 168.656,67.232 v1(168.656,62.992)
  Bottom Layer w1: v1(107.569,108.204) 107.615,108.25 109.428,108.25 R9.1 ; D2.1 R9.1@109.481,108.296 ; v1(141.859,96.012) 141.859,68.404 142.445,67.818 v1(153.543,67.818) ; R47.2 v1(168.656,62.992) J3.5
NetD2_2: D2.2 R12.1 R14.2 | length 17.1
  Bottom Layer w1: R12.1@103.697,102.427 104.321,102.427 104.467,102.573 104.467,102.865 104.819,103.216 110.871,103.216 ; D2.2 110.871,103.216 ; R14.2@118.143,103.216 110.871,103.216
NetD2_6: D2.6 R4.1 R6.2 | length 15
  Bottom Layer w1: D2.6 112.141,101.141 112.727,101.727 122.331,101.727 122.555,101.951 ; R4.1 122.555,101.951 ; R6.2 122.555,101.951
NetD2_7: D2.7 J3.4 R2.1 R46.2 | length 115.6
  Top Layer w1: v1(120.396,95.758) 127.303,95.758 127.889,96.344 127.889,103.173 128.475,103.759 138.682,103.759 139.267,103.173 139.267,96.064 v1(139.319,96.012) ; v1(153.543,64.008) 164.26,64.008 164.846,63.422 164.846,61.595 165.989,60.452 v1(168.656,60.452)
  Bottom Layer w1: D2.7 110.871,96.401 111.457,95.815 R2.1 113.567,95.787 120.367,95.787 v1(120.396,95.758) ; v1(139.319,96.012) 139.319,64.594 139.905,64.008 v1(153.543,64.008) ; R46.2 v1(168.656,60.452) J3.4
NetD3_1: D3.1 J4.3 R27.1 R49.2 | length 118.7
  Top Layer w1: v1(106.108,127.444) 110.744,132.08 163.317,132.08 166.116,129.281 166.116,97.79 v1(162.687,94.361)
  Bottom Layer w1: v1@106.045,127.381 v1(106.108,127.444) 106.172,127.508 106.172,127.903 106.758,128.489 R27.1 ; D3.1 R27.1@109.481,128.362 ; v1(162.687,94.361) 166.038,94.361 166.624,93.775 R49.2 J4.3
NetD3_2: D3.2 R29.1 R31.2 | length 17.1
  Bottom Layer w1: R29.1@103.697,122.493 104.321,122.493 104.467,122.639 104.467,122.931 104.819,123.282 110.871,123.282 ; D3.2 110.871,123.282 ; R31.2@118.143,123.282 110.871,123.282
NetD3_6: D3.6 R23.1 R24.2 | length 15
  Bottom Layer w1: D3.6 112.141,121.207 112.727,121.793 122.331,121.793 122.555,122.017 ; R23.1 122.555,122.017 ; R24.2@122.555,123.282 122.555,122.017
NetD3_7: D3.7 J4.2 R21.1 R48.2 | length 143.2
  Top Layer w1: v1(118.618,115.697) 118.618,127.635 120.777,129.794 162.609,129.794 163.195,129.208 163.195,97.663 159.131,93.599 153.748,93.599 153.162,93.013 153.162,84.963 153.797,84.328 v1(163.195,84.328)
  Bottom Layer w1: D3.7 110.871,116.233 111.222,115.881 R21.1@113.538,115.881 ; R21.1 v1(118.618,115.697) ; v1(163.195,84.328) 163.247,84.38 166.108,84.38 166.694,84.965 R48.2 J4.2
NetD4_1: D4.1 J6.3 R35.1 | length 148.7
  Top Layer w1: v1(105.791,68.199) 105.791,72.263 106.807,73.279 112.825,73.279 113.411,73.865 113.411,76.003 113.997,76.589 117.923,76.589 117.995,76.661 121.77,76.661 122.428,76.003 122.428,63.197 123.014,62.611 137.717,62.611 138.303,63.197 138.303,87.376 148.717,97.79 155.116,97.79 155.702,98.376 155.702,124.763 156.288,125.349 v1(160.147,125.349)
  Bottom Layer w1: v1(105.791,68.199) 105.818,68.226 109.433,68.226 R35.1 ; D4.1 R35.1@109.481,68.164 ; v1(160.147,125.349) 160.22,125.349 160.347,125.222 J6.3
NetD4_2: D4.2 R36.1 R37.2 | length 17.1
  Bottom Layer w1: R36.1@103.697,62.295 104.321,62.295 104.467,62.441 104.467,62.733 104.819,63.084 110.871,63.084 ; D4.2 110.871,63.084 ; R37.2 110.871,63.084
NetD4_6: D4.6 R33.1 R34.2 | length 14.9
  Bottom Layer w1: D4.6 112.141,61.009 112.727,61.595 122.555,61.595 ; R33.1 122.555,61.595 ; R34.2@122.555,63.084 122.555,61.595
NetD4_7: D4.7 J6.2 R32.1 | length 125.6
  Top Layer w1: v1(121.031,55.753) 130.519,55.753 130.588,55.683 140.003,55.683 140.589,56.269 140.589,86.106 150.114,95.631 157.275,95.631 157.861,96.217 157.861,122.172 158.447,122.757 160.095,122.757 v1(160.147,122.809)
  Bottom Layer w1: D4.7 110.871,56.035 111.222,55.683 R32.1 113.573,55.718 120.996,55.718 v1(121.031,55.753) ; v1(160.147,122.809) 160.22,122.809 160.347,122.682 J6.2
NetJ2_1: J2.1 R18.2 U1.6 Z1.1 | length 12.3
  Bottom Layer w1: J2.1@85.494,137.795 85.494,135.373 85.521,135.347 87.862,135.347 R18.2 92.994,135.198 93.345,134.846 U1.6
NetJ2_3: J2.3 R17.1 U1.7 Z2.1 | length 35.2
  Bottom Layer w1: Z2.1 75.542,135.589 75.542,137.795 75.535,137.801 75.535,139.368 76.121,139.954 94.029,139.954 94.615,139.368 94.615,134.719 ; U1.7 94.615,134.719 ; R17.1 94.966,135.071 94.615,134.719
NetLED1_2: LED1.2 R44.1 | length 6.5
  Bottom Layer w1: LED1.2 164.206,52.705 164.557,53.056 R44.1
NetLED2_2: LED2.2 R45.1 | length 4.4
  Bottom Layer w1: LED2.2 161.417,57.912 R45.1
NetLED3_2: LED3.2 R46.1 | length 4.4
  Bottom Layer w1: LED3.2 161.417,60.452 R46.1
NetLED4_2: LED4.2 R48.1 | length 4.7
  Bottom Layer w1: LED4.2 163.937,87.122 164.289,87.473 164.289,87.835 R48.1
NetLED5_2: LED5.2 R49.1 | length 4.4
  Bottom Layer w1: LED5.2 160.69,91.694 161.674,90.71 164.419,90.71 164.451,90.678 R49.1
NetLED6_2: LED6.2 R47.1 | length 6.5
  Bottom Layer w1: LED6.2 164.206,65.659 164.557,65.308 R47.1
NetP1_2: P1.2 R25.2 | length 7.7
  Bottom Layer w1: P1.2 34.548,75.469 36.498,75.469 37.084,74.884 37.084,72.849 37.67,72.263 R25.2
NetP2_2: P2.2 R20.2 | length 7.4
  Bottom Layer w1: P2.2 34.467,55.403 36.498,55.403 37.084,54.818 37.084,53.646 37.985,52.745 38.729,52.745 39.37,52.104 39.521,52.104 R20.2
NetP3_2: P3.2 R28.2 | length 7.9
  Bottom Layer w1: P3.2 36.625,110.109 37.211,109.523 37.211,107.231 37.797,106.645 R28.2
NetP4_2: P4.2 R38.2 | length 7.9
  Bottom Layer w1: P4.2 36.59,120.015 37.176,119.429 37.176,117.229 37.762,116.643 R38.2
NetP5_2: P5.2 R40.2 | length 8
  Bottom Layer w1: P5.2 36.625,129.921 37.211,129.335 37.211,127.008 37.797,126.422 R40.2
NetP6_2: P6.2 R42.2 | length 8.1
  Bottom Layer w1: P6.2 36.625,65.532 37.211,64.946 37.211,62.492 37.797,61.906 R42.2
VCC: *.15 C1.1 D1.8 D2.8 D3.8 D4.8 J3.1 J4.1 J6.1 P1.3 P2.3 P3.3 P4.3 P5.3 P6.3 R3.2 R4.2 R7.2 R10.2 R11.2 R12.2 R17.2 R23.2 R29.2 R33.2 R36.2 RG1.3 U1.8 | length 586.3
  Top Layer w1: v2(57.531,68.707) v2(70.231,68.707) ; v1(175.514,62.357) 175.514,65.379 175.641,65.506 v1(175.641,68.58) ; v1(175.641,95.885) v1(175.641,100.965)
  Bottom Layer w1: P1.3 31.623,73.025 ; P6.3 31.623,62.992 ; P4.3 31.916,117.475 31.623,117.182 ; P5.3 31.623,127.381 31.623,117.182 ; *.15 40.894,103.554 40.308,104.14 35.13,104.14 34.544,104.726 P3.3 31.623,107.569 ; v2(57.531,68.707) R7.2 ; R10.2 v2(70.231,68.707) 68.199,66.675 68.199,49.53 ; U1.8 95.908,132.991 99.927,132.991 R17.2 99.949,120.904 100.619,120.234 R29.2 ; R36.2@104.038,60.011 D4.8 109.481,57.819 109.474,57.811 109.474,53.467 ; R12.2@104.038,100.143 D2.8 D2.8 109.482,95.754 109.483,95.752 ; R29.2@104.038,120.209 D3.8 109.481,113.616 110.067,113.03 122.555,113.03 ; R11.2 104.105,81.485 104.691,80.899 108.795,80.899 109.217,80.477 109.281,80.477 109.381,80.377 109.381,80.177 D1.8 109.481,74.119 110.067,73.533 122.204,73.533 ; 109.601,95.751 109.601,93.95 109.952,93.599 122.204,93.599 ; R33.2 122.555,53.818 122.204,53.467 ; R3.2 122.555,73.884 122.204,73.533 ; R4.2 122.555,93.95 122.204,93.599 ; R23.2 122.555,113.03 ; 31.623,62.992 31.623,73.025 ; 31.623,62.992 31.623,53.64 32.209,53.055 34.275,53.055 P2.3 37.8,49.53 68.199,49.53 ; 31.623,73.025 31.623,107.569 ; 31.623,107.569 31.623,117.182 ; 68.199,49.53 108.712,49.53 109.474,50.292 109.474,53.467 ; 109.474,53.467 122.204,53.467 ; 122.204,53.467 131.97,53.467 132.556,54.053 132.556,73.533 ; 122.204,73.533 132.556,73.533 ; 122.204,93.599 132.429,93.599 132.556,93.726 ; 122.555,113.03 122.555,112.981 123.141,112.395 C1.1 132.556,93.726 ; 132.556,73.533 132.556,93.726
  Bottom Layer w2: C1.1 133.606,112.395 133.606,113.758 134.778,114.93 RG1.3 148.209,119.791 148.56,120.142 J6.1 175.29,120.142 175.641,119.791 v1(175.641,100.965) ; J3.1 174.342,52.832 175.514,54.004 v1(175.514,62.357) ; J4.1 175.641,85.598 ; v1(175.641,68.58) 175.641,85.598 ; v1(175.641,95.885) 175.641,85.598
pads on no net: *.2 *.17 *.18 *.22 *.23 *.27 *.28 *.29 *.30

## Silkscreen, mask and mechanical layers (free items; w line width, h text height)
Mechanical 1:
  the board outline again, w0.254

## Dimensions
29.718,142.875 to 179.705,142.875 on Mechanical 1
29.718,142.875 to 29.718,42.799 on Mechanical 1

## Text inside footprints (layer, text, board x,y; h text height)
LED1: Top Overlay "K" at 156.718,53.975 h0.76 r180; Mechanical 15 "K" at 156.718,53.975 h0.76 r180
LED2: Top Overlay "K" at 156.718,58.293 h0.76 r180; Mechanical 15 "K" at 156.718,58.293 h0.76 r180
LED3: Top Overlay "K" at 156.718,62.611 h0.76 r180; Mechanical 15 "K" at 156.718,62.611 h0.76 r180
LED4: Top Overlay "K" at 156.718,88.392 h0.76 r180; Mechanical 15 "K" at 156.718,88.392 h0.76 r180
LED5: Top Overlay "K" at 156.718,92.964 h0.76 r180; Mechanical 15 "K" at 156.718,92.964 h0.76 r180
LED6: Top Overlay "K" at 156.718,66.929 h0.76 r180; Mechanical 15 "K" at 156.718,66.929 h0.76 r180
SW1: Top Overlay "*" at 56.896,62.547 h1.27 r90; Mechanical 13 "*" at 58.712,65.646 h1.27 r90
SW2: Top Overlay "*" at 69.545,62.573 h1.27 r90; Mechanical 13 "*" at 71.361,65.672 h1.27 r90